# EAGLE board PCB_Driver_Mosfet (EAGLE 9.6.2)
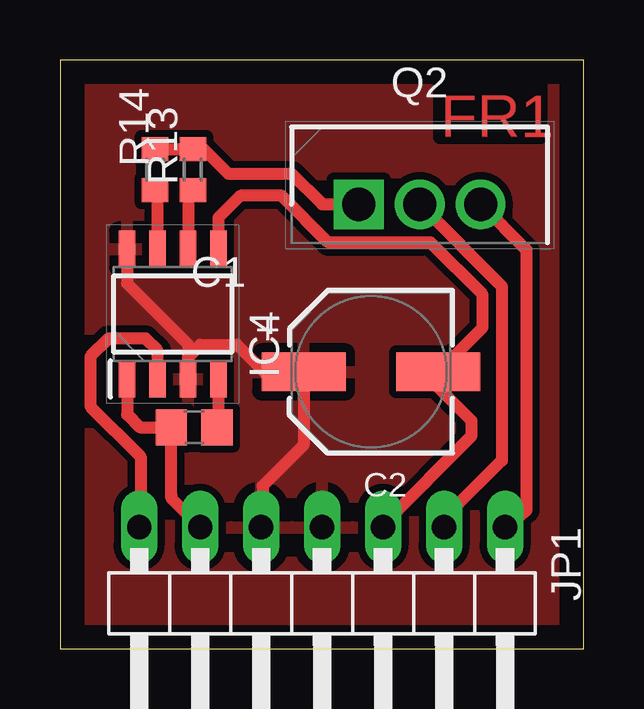
[diagram p0: board, top side]

Size 21.82 x 24.56 mm. Coordinates in mm from the lower left corner, seen from the top.
Outline: 0,0 21.82,0 21.82,24.56 0,24.56 0,0
Copper layers (1*16): Top 0.035mm / dielectric 1.5mm / Bottom 0.035mm
Design rules "fixhregle *": minimum track width 0.2mm, minimum drill 0.6mm, track to track 0.3mm, track to pad 0.3mm, pad to pad 0.3mm, via to via 0.3mm, smd to smd 0.185mm, copper to edge 1mm, drill to drill 0.4mm, minimum pad ring 0.2mm, minimum via ring 0.2mm, stop-mask expansion 4mil, vias tented up to drill 0mil, thermal gap 0.4mm

## Footprints (pad centres in the part's own frame; a part is rotated, then mirrored left to right if it is on the bottom)
C0805 = smd 1.3 x 1.5: 1 -0.95,0; 2 0.95,0
WCAP-ASLI_6.3X7.7(DXL) = smd 3.5 x 1.6: 1 2.8,0; 2 -2.8,0
SOIC127P600X175-8N = smd 1.525 x 0.7: 1 -2.712,1.905; 2 -2.712,0.635; 3 -2.712,-0.635; 4 -2.712,-1.905; 5 2.712,-1.905; 6 2.712,-0.635; 7 2.712,0.635; 8 2.712,1.905
1X07/90 = drill 1.016 long: 1 -7.62,-3.81; 2 -5.08,-3.81; 3 -2.54,-3.81; 4 0,-3.81; 5 2.54,-3.81; 6 5.08,-3.81; 7 7.62,-3.81
TO254P483X1016X1994-3P = drill 1.38 pad 2.07 square: 1 0,0 | drill 1.38 pad 2.07: 2 2.54,0; 3 5.08,0
R0603 = smd 1 x 1.1: 1 -0.85,0; 2 0.85,0

## Placement (x,y rotation side)
C1  100n  [C0805]  5.59,9.25 0 top
C2  10 µF  [WCAP-ASLI_6.3X7.7(DXL)]  12.95,11.56 180 top
IC4  1EDI20N12AF  [SOIC127P600X175-8N]  4.7,13.97 90 top
JP1  [1X07/90]  10.92,1.27 180 top
Q2  IRFB7530PBF  [TO254P483X1016X1994-3P]  12.45,18.54 0 top
R13  10  [R0603]  5.54,19.99 90 top
R14  3.3  [R0603]  3.96,19.99 90 top

## Library data of the parts
C1 = rcl; SPICEPREFIX: C
C2 = Eagle_WCAP-ASLI (rev20a); DATASHEET-URL: https://www.we-online.com/catalog/datasheet/865080845005.pdf; DF: 10%; DIAMETER: 6.3mm; I-LEAK: 10uA; I-RIPPLE: 35mA; L: 7.7mm; OPERATING-TEMPERATURE: -55 °C up to +105 °C; PART-NUMBER: 865080845005; TECHNICAL-REFERENCE: ASED077100M100DVCTCB000; VR: 100V(DC)
IC4 = 1EDI20N12AF; DESCRIPTION: Gate Drivers 1200V Isolated 1-CH, 3.5A,Separate Output; HEIGHT: 1.75mm; MANUFACTURER_NAME: Infineon; MANUFACTURER_PART_NUMBER: 1EDI20N12AF; MOUSER_PART_NUMBER: 726-1EDI20N12AF; MOUSER_PRICE-STOCK: https://www.mouser.co.uk/ProductDetail/Infineon-Technologies/1EDI20N12AF?qs=Fdzd9GSp%252BASr8JSo1G1nbg%3D%3D
JP1 = pinhead
Q2 = IRFB7530PBF; ARROW_PART_NUMBER: IRFB7530PBF; ARROW_PRICE-STOCK: https://www.arrow.com/en/products/irfb7530pbf/infineon-technologies-ag; DESCRIPTION: Infineon IRFB7530PBF N-channel MOSFET, 195 A, 60 V StrongIRFET, 3-Pin TO-220AB; HEIGHT: 4.83mm; MANUFACTURER_NAME: Infineon; MANUFACTURER_PART_NUMBER: IRFB7530PBF; MOUSER_PART_NUMBER: 942-IRFB7530PBF; MOUSER_PRICE-STOCK: https://www.mouser.co.uk/ProductDetail/Infineon-IR/IRFB7530PBF?qs=a7rcPCEf1Q%2FFGrR%252BNclv%2FQ%3D%3D
R13 R14 = rcl; SPICEPREFIX: R

## Nets
CMD: IC4.2 JP1.7
GND: C2.1 IC4.3 IC4.8 JP1.4 JP1.5
MCC_OUTPUT: JP1.2 Q2.2
N$1: IC4.6 R13.1
N$2: IC4.7 R14.1
N$7: C1.2 IC4.4
N$18: Q2.1 R13.2 R14.2
RD: JP1.1 Q2.3
VCC12: C2.2 IC4.5 JP1.3
VCC33: C1.1 IC4.1 JP1.6

## Tracks (layer width: path | path; a pad name or v marks a point on that pad's centre or on a via)
CMD
  Top 0.5: 3.36,8.02 3.36,5.14 JP1.7
  Top 0.508: IC4.2 4.06,12.45 3.56,12.95 2.03,12.95 1.27,12.19 1.27,10.12 3.36,8.02
GND
  Top 0.508: 8.76,11.43 8.63,11.43 7.38,12.68 5.83,12.68 5.33,12.18 IC4.3 5.33,12.7 2.79,15.24 IC4.8 | JP1.5 8.44,6.8 10.15,8.51 C2.1 10.03,11.43 9.65,11.43
  pour Top: 0,24.64 21.84,24.64 21.84,0 0,0
MCC_OUTPUT
  Top 0.508: Q2.2 18.41,15.11 18.41,7.86 16.06,5.51 JP1.2
N$1
  Top 0.508: R13.1 5.33,18.94 IC4.6
N$2
  Top 0.5: IC4.7 4.06,19.04 R14.1
N$7
  Top 0.508: C1.2 6.6,9.25 IC4.4
N$18
  Top 0.5: R14.2 R13.2
  Top 0.508: Q2.1 10.92,18.54 9.65,19.81 7.02,19.81 5.99,20.84 R13.2
RD
  Top 0.508: Q2.3 19.43,16.64 19.43,5.79 JP1.1
VCC12
  Top 0.5: C2.2 17.61,13.41 17.61,14.78 15.43,16.96 11.18,16.96 9.24,18.9 7.52,18.9 6.6,17.98 IC4.5
  Top 0.508: C2.2 15.75,10.92 17.14,9.53 17.14,8.89 13.52,5.27 JP1.3
VCC33
  Top 0.5: JP1.6 4.64,6.28 4.64,6.42
  Top 0.508: IC4.1 2.79,9.78 3.33,9.25 C1.1 4.64,6.42

## Text on the board
Top: FR1